# EAGLE board FB_BJ6 (EAGLE 5.00), part 1 of 2
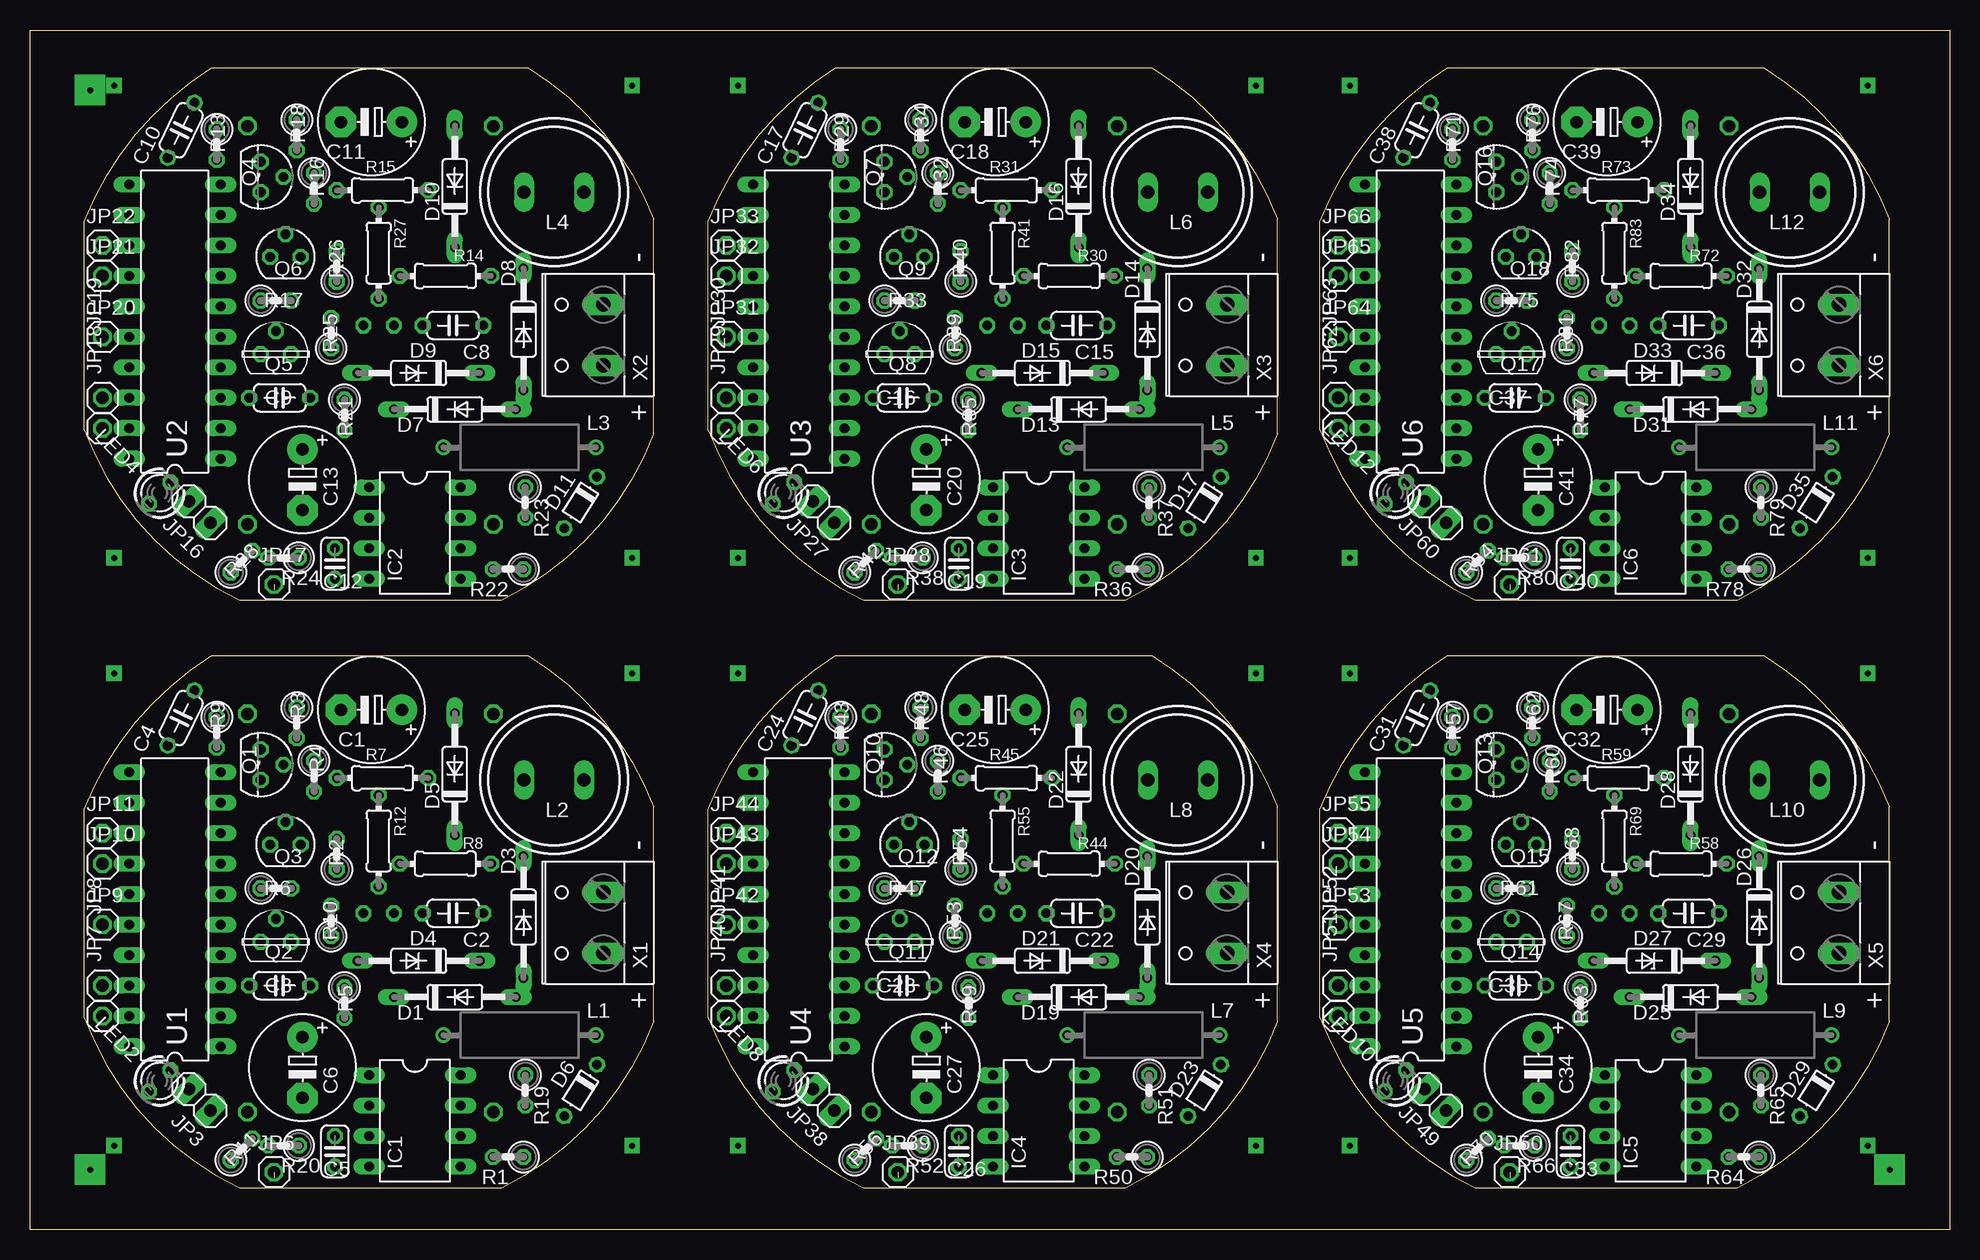
[diagram p0: board, top side]
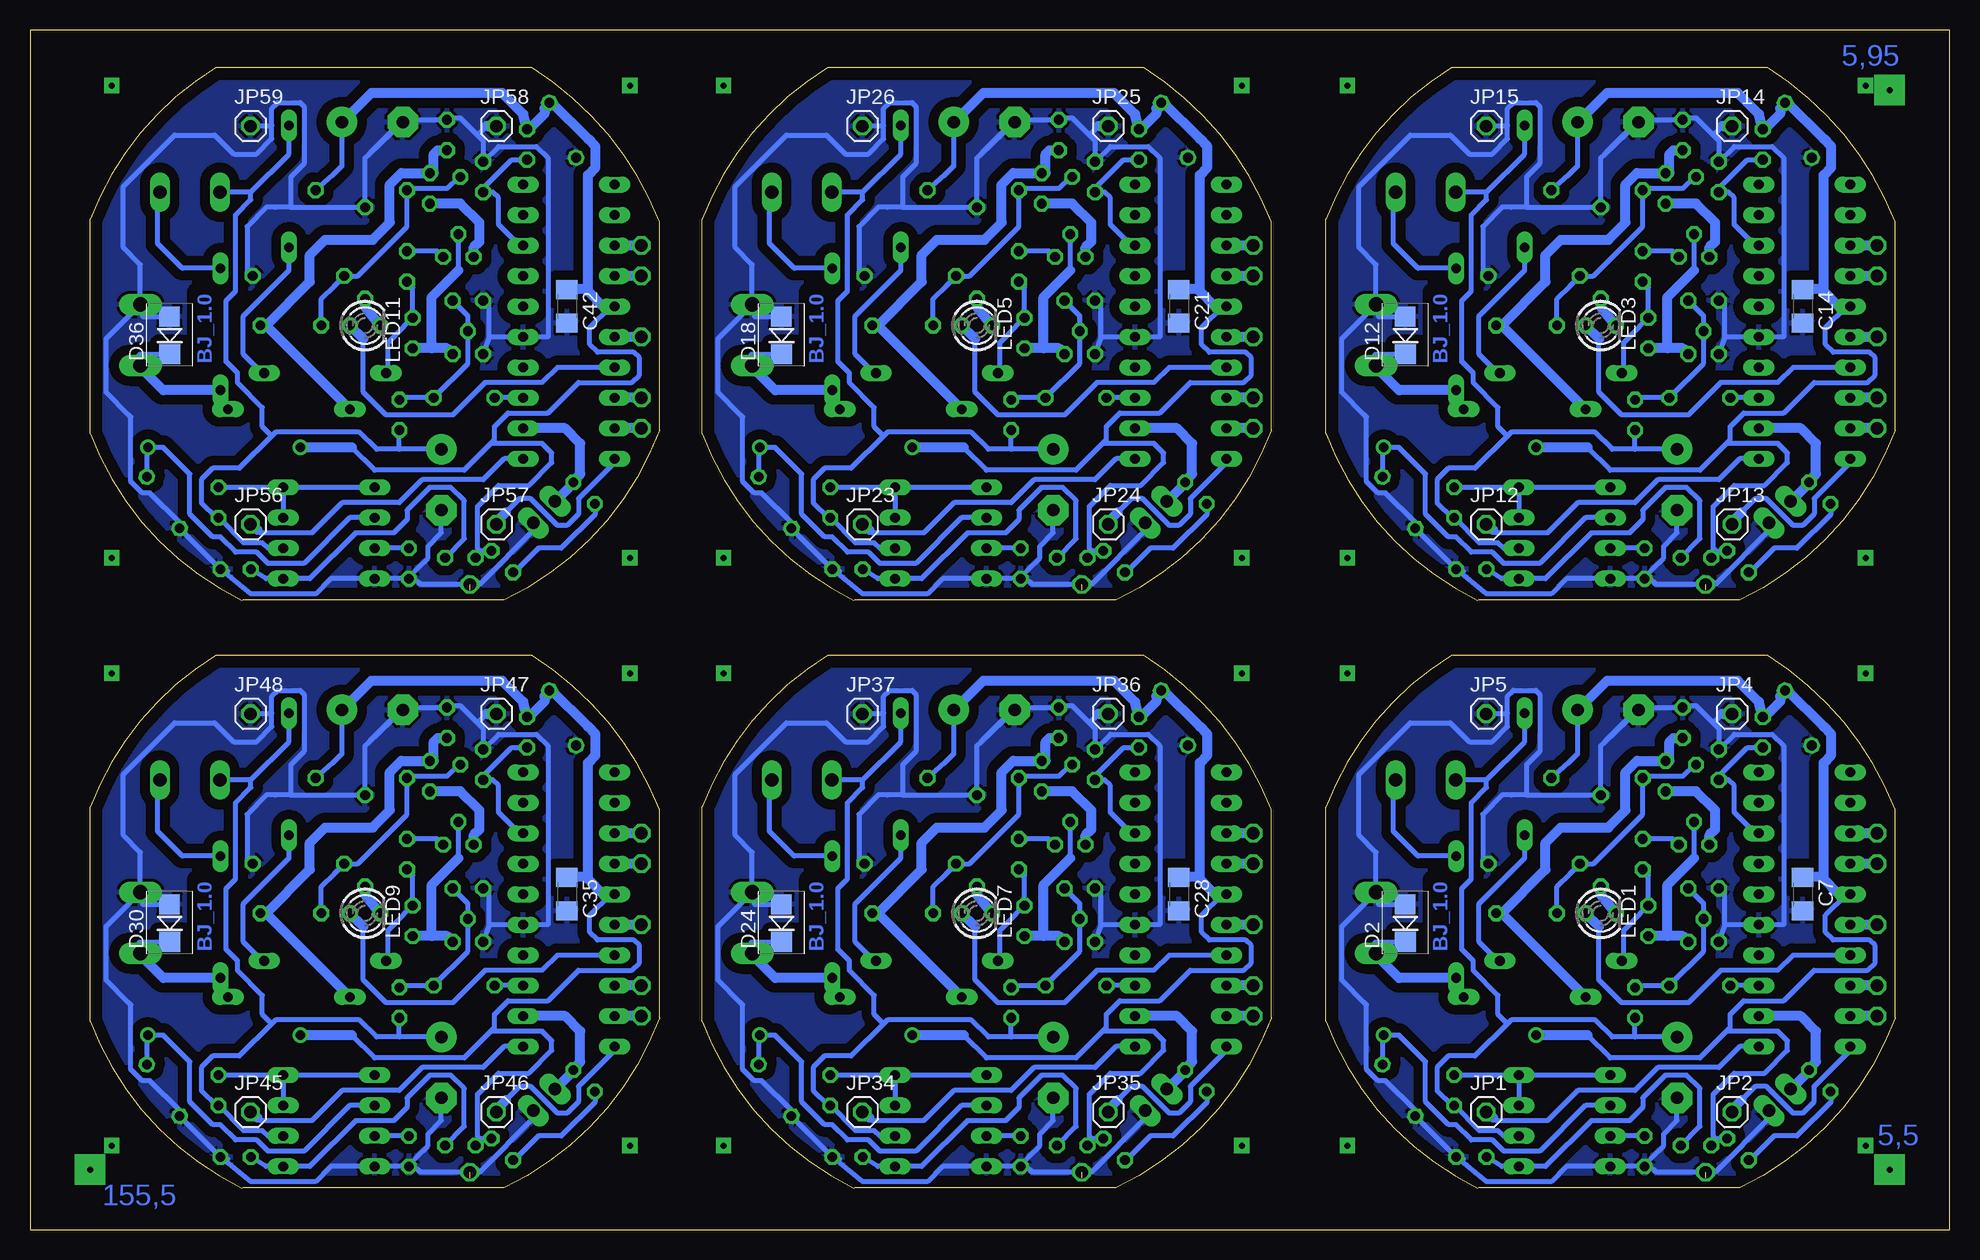
[diagram p1: board, bottom side, seen from below]

Size 160 x 100 mm. Coordinates in mm from the lower left corner, seen from the top.
Outline: 15.15,47.84 41.51,47.84
Outline: 51.96,17.36 51.97,35.21
Outline: 17.49,3.46 39.29,3.46
Outline: 17.48,3.46 arc-44 4.54,17.65 4.54,35.04 arc-36 15.15,47.84
Outline: 41.52,47.84 arc-38 51.97,35.21
Outline: 51.96,17.37 arc-44 39.29,3.46
Outline: 15.15,96.84 41.51,96.84
Outline: 51.96,66.36 51.97,84.21
Outline: 17.49,52.46 39.29,52.46
Outline: 17.48,52.46 arc-44 4.54,66.65 4.54,84.04 arc-36 15.15,96.84
Outline: 41.52,96.84 arc-38 51.97,84.21
Outline: 51.96,66.37 arc-44 39.29,52.46
Outline: 67.16,96.84 93.5,96.84
Outline: 103.96,66.36 103.97,84.21
Outline: 69.49,52.46 91.29,52.46
Outline: 69.48,52.46 arc-44 56.54,66.65 56.54,84.04 arc-36 67.15,96.84
Outline: 93.52,96.84 arc-38 103.97,84.21
Outline: 103.96,66.37 arc-44 91.29,52.46
Outline: 67.16,47.84 93.5,47.84
Outline: 103.96,17.36 103.97,35.21
Outline: 69.49,3.46 91.29,3.46
Outline: 69.48,3.46 arc-44 56.54,17.65 56.54,35.04 arc-36 67.15,47.84
Outline: 93.52,47.84 arc-38 103.97,35.21
Outline: 103.96,17.37 arc-44 91.29,3.46
Outline: 118.16,47.84 144.5,47.84
Outline: 154.96,17.36 154.97,35.21
Outline: 120.49,3.46 142.29,3.46
Outline: 120.48,3.46 arc-44 107.54,17.65 107.54,35.04 arc-36 118.15,47.84
Outline: 144.51,47.84 arc-38 154.97,35.21
Outline: 154.96,17.37 arc-44 142.29,3.46
Outline: 118.16,96.84 144.5,96.84
Outline: 154.96,66.36 154.97,84.21
Outline: 120.49,52.46 142.29,52.46
Outline: 120.48,52.46 arc-44 107.54,66.65 107.54,84.04 arc-36 118.15,96.84
Outline: 144.51,96.84 arc-38 154.97,84.21
Outline: 154.96,66.37 arc-44 142.29,52.46
Outline: 0,0 0,100 160,100 160,0 0,0
Copper layers (1*16): Top 0.035mm / dielectric 1.5mm / Bottom 0.035mm
Design rules "default": minimum track width 10mil, minimum drill 24mil, track to track 8mil, track to pad 8mil, pad to pad 8mil, via to via 8mil, smd to smd 8mil, copper to edge 40mil, drill to drill 8mil, minimum pad ring 10mil, minimum via ring 8mil, stop-mask expansion 4mil, vias tented up to drill 0mil, thermal gap 10mil

## Footprints (pad centres in the part's own frame; a part is rotated, then mirrored left to right if it is on the bottom)
E5-8,5 = drill 1.016 pad 2.54 round: + -2.54,0 | drill 1.016 pad 2.54 octagon: - 2.54,0
C050-024X044 = drill 0.813 octagon: 1 -2.54,0; 2 2.54,0
C025-024X044 = drill 0.813 octagon: 1 -1.27,0; 2 1.27,0
C1206 = smd 1.6 x 1.8: 1 -1.4,0; 2 1.4,0
DO35-10 = drill 0.813 long: A 5.08,0; C -5.08,0
SMA = smd 1.67 x 1.73: 1 -1.576,0; 2 1.58,0.014
DO35Z10 = drill 0.813 long: A 5.08,0; C -5.08,0
D-5 = drill 0.813 octagon: A 2.54,0; C -2.54,0
DIL08 = drill 0.813 long: 1 -3.81,-3.81; 2 -1.27,-3.81; 3 1.27,-3.81; 4 3.81,-3.81; 5 3.81,3.81; 6 1.27,3.81; 7 -1.27,3.81; 8 -3.81,3.81
1X01 = drill 1.016 octagon: 1 0,0
1X02 = drill 1.016 long: 1 -1.27,0; 2 1.27,0
2200-12.7 = drill 0.8 pad 1.27 round: 1 -6.35,0; 2 6.35,0
SD12_1000 = drill 1.1 long: 1 -2.5,0; 2 2.5,0
LED3MM = drill 0.813 octagon: A -1.27,0; K 1.27,0
TO92 = drill 0.813 octagon: 1 1.27,0; 2 0,1.905; 3 -1.27,0
TO237 = drill 0.813 octagon: 1 1.27,0; 2 0,1.905; 3 -1.27,0
SOT54D = drill 0.813 octagon: B 1.27,0; C 0,1.905; E -1.27,0
0207/2V = drill 0.813 octagon: 1 -1.27,0; 2 1.27,0
0204/7 = drill 0.813 octagon: 1 -3.81,0; 2 3.81,0
DIL20 = drill 0.813 long: 1 -11.43,-3.81; 2 -8.89,-3.81; 3 -6.35,-3.81; 4 -3.81,-3.81; 5 -1.27,-3.81; 6 1.27,-3.81; 7 3.81,-3.81; 8 6.35,-3.81; 9 8.89,-3.81; 10 11.43,-3.81; 11 11.43,3.81; 12 8.89,3.81; 13 6.35,3.81; 14 3.81,3.81; 15 1.27,3.81; 16 -1.27,3.81; 17 -3.81,3.81; 18 -6.35,3.81; 19 -8.89,3.81; 20 -11.43,3.81
W237-132 = drill 1.194 long: 1 -2.54,-0.635; 2 2.54,-0.635

## Placement (x,y rotation side)
C1  100µ  [E5-8,5]  28.46,43.32 180 top
C2  100n  [C050-024X044]  35.26,26.37 180 top
C3  100n  [C050-024X044]  20.81,20.33 180 top
C4  100n  [C050-024X044]  12.6,42.65 64.1 top
C5  470p  [C025-024X044]  25.41,6.52 270 top
C6  100µ  [E5-8,5]  22.72,13.51 270 top
C7  [C1206]  12.24,27.95 270 bottom
C8  100n  [C050-024X044]  35.26,75.37 180 top
C9  100n  [C050-024X044]  20.81,69.33 180 top
C10  100n  [C050-024X044]  12.6,91.65 64.1 top
C11  100µ  [E5-8,5]  28.46,92.32 180 top
C12  470p  [C025-024X044]  25.41,55.52 270 top
C13  100µ  [E5-8,5]  22.72,62.51 270 top
C14  [C1206]  12.24,76.95 270 bottom
C15  100n  [C050-024X044]  87.26,75.37 180 top
C16  100n  [C050-024X044]  72.81,69.33 180 top
C17  100n  [C050-024X044]  64.6,91.65 64.1 top
C18  100µ  [E5-8,5]  80.46,92.32 180 top
C19  470p  [C025-024X044]  77.42,55.52 270 top
C20  100µ  [E5-8,5]  74.72,62.51 270 top
C21  [C1206]  64.24,76.95 270 bottom
C22  100n  [C050-024X044]  87.26,26.37 180 top
C23  100n  [C050-024X044]  72.81,20.33 180 top
C24  100n  [C050-024X044]  64.6,42.65 64.1 top
C25  100µ  [E5-8,5]  80.46,43.32 180 top
C26  470p  [C025-024X044]  77.42,6.52 270 top
C27  100µ  [E5-8,5]  74.72,13.51 270 top
C28  [C1206]  64.24,27.95 270 bottom
C29  100n  [C050-024X044]  138.26,26.37 180 top
C30  100n  [C050-024X044]  123.81,20.33 180 top
C31  100n  [C050-024X044]  115.6,42.65 64.1 top
C32  100µ  [E5-8,5]  131.46,43.32 180 top
C33  470p  [C025-024X044]  128.41,6.52 270 top
C34  100µ  [E5-8,5]  125.72,13.51 270 top
C35  [C1206]  115.24,27.95 270 bottom
C36  100n  [C050-024X044]  138.26,75.37 180 top
C37  100n  [C050-024X044]  123.81,69.33 180 top
C38  100n  [C050-024X044]  115.6,91.65 64.1 top
C39  100µ  [E5-8,5]  131.46,92.32 180 top
C40  470p  [C025-024X044]  128.41,55.52 270 top
C41  100µ  [E5-8,5]  125.72,62.51 270 top
C42  [C1206]  115.24,76.95 270 bottom
D1  [DO35-10]  35.42,19.38 0 top
D2  [SMA]  45.35,25.54 90 bottom
D3  [DO35-10]  41.13,26.05 270 top
D4  7V5  [DO35Z10]  32.4,22.4 180 top
D5  [DO35-10]  35.42,37.96 90 top
D6  BAT46  [D-5]  45.89,11.6 237.6 top
D7  [DO35-10]  35.42,68.38 0 top
D8  [DO35-10]  41.13,75.05 270 top
D9  7V5  [DO35Z10]  32.4,71.4 180 top
D10  [DO35-10]  35.42,86.96 90 top
D11  BAT46  [D-5]  45.89,60.6 237.6 top
D12  [SMA]  45.35,74.54 90 bottom
D13  [DO35-10]  87.42,68.38 0 top
D14  [DO35-10]  93.13,75.05 270 top
D15  7V5  [DO35Z10]  84.4,71.4 180 top
D16  [DO35-10]  87.42,86.96 90 top
D17  BAT46  [D-5]  97.89,60.6 237.6 top
D18  [SMA]  97.35,74.54 90 bottom
D19  [DO35-10]  87.42,19.38 0 top
D20  [DO35-10]  93.13,26.05 270 top
D21  7V5  [DO35Z10]  84.4,22.4 180 top
D22  [DO35-10]  87.42,37.96 90 top
D23  BAT46  [D-5]  97.89,11.6 237.6 top
D24  [SMA]  97.35,25.54 90 bottom
D25  [DO35-10]  138.42,19.38 0 top
D26  [DO35-10]  144.13,26.05 270 top
D27  7V5  [DO35Z10]  135.4,22.4 180 top
D28  [DO35-10]  138.42,37.96 90 top
D29  BAT46  [D-5]  148.89,11.6 237.6 top
D30  [SMA]  148.35,25.54 90 bottom
D31  [DO35-10]  138.42,68.38 0 top
D32  [DO35-10]  144.13,75.05 270 top
D33  7V5  [DO35Z10]  135.4,71.4 180 top
D34  [DO35-10]  138.42,86.96 90 top
D35  BAT46  [D-5]  148.89,60.6 237.6 top
D36  [SMA]  148.35,74.54 90 bottom
IC1  MC34063AP  [DIL08]  32.08,9.06 270 top
IC2  MC34063AP  [DIL08]  32.08,58.06 270 top
IC3  MC34063AP  [DIL08]  84.08,58.06 270 top
IC4  MC34063AP  [DIL08]  84.08,9.06 270 top
IC5  MC34063AP  [DIL08]  135.08,9.06 270 top
IC6  MC34063AP  [DIL08]  135.08,58.06 270 top
JP1  [1X01]  38.62,9.79 0 bottom
JP2  [1X01]  18.12,9.79 0 bottom
JP3  [1X02]  14.14,10.81 135 top
JP4  [1X01]  18.12,42.99 0 bottom
JP5  [1X01]  38.62,42.99 0 bottom
JP6  [1X01]  20.34,4.78 0 top
JP7  [1X01]  6.05,17.8 0 top
JP8  [1X01]  6.05,20.34 0 top
JP9  [1X01]  6.05,25.41 0 top
JP10  [1X01]  6.05,30.5 0 top
JP11  [1X01]  6.05,33.04 0 top
JP12  [1X01]  38.62,58.79 0 bottom
JP13  [1X01]  18.12,58.79 0 bottom
JP14  [1X01]  18.12,91.99 0 bottom
JP15  [1X01]  38.62,91.99 0 bottom
JP16  [1X02]  14.14,59.81 135 top
JP17  [1X01]  20.34,53.78 0 top
JP18  [1X01]  6.05,66.8 0 top
JP19  [1X01]  6.05,69.34 0 top
JP20  [1X01]  6.05,74.42 0 top
JP21  [1X01]  6.05,79.5 0 top
JP22  [1X01]  6.05,82.04 0 top
JP23  [1X01]  90.62,58.79 0 bottom
JP24  [1X01]  70.12,58.79 0 bottom
JP25  [1X01]  70.12,91.99 0 bottom
JP26  [1X01]  90.62,91.99 0 bottom
JP27  [1X02]  66.14,59.81 135 top
JP28  [1X01]  72.33,53.78 0 top
JP29  [1X01]  58.05,66.8 0 top
JP30  [1X01]  58.05,69.34 0 top
JP31  [1X01]  58.05,74.42 0 top
JP32  [1X01]  58.05,79.5 0 top
JP33  [1X01]  58.05,82.04 0 top
JP34  [1X01]  90.62,9.79 0 bottom
JP35  [1X01]  70.12,9.79 0 bottom
JP36  [1X01]  70.12,42.99 0 bottom
JP37  [1X01]  90.62,42.99 0 bottom
JP38  [1X02]  66.14,10.81 135 top
JP39  [1X01]  72.33,4.78 0 top
JP40  [1X01]  58.05,17.8 0 top
JP41  [1X01]  58.05,20.34 0 top
JP42  [1X01]  58.05,25.41 0 top
JP43  [1X01]  58.05,30.5 0 top
JP44  [1X01]  58.05,33.04 0 top
JP45  [1X01]  141.62,9.79 0 bottom
JP46  [1X01]  121.12,9.79 0 bottom
JP47  [1X01]  121.12,42.99 0 bottom
JP48  [1X01]  141.62,42.99 0 bottom
JP49  [1X02]  117.14,10.81 135 top
JP50  [1X01]  123.33,4.78 0 top
JP51  [1X01]  109.05,17.8 0 top
JP52  [1X01]  109.05,20.34 0 top
JP53  [1X01]  109.05,25.41 0 top
JP54  [1X01]  109.05,30.5 0 top
JP55  [1X01]  109.05,33.04 0 top
JP56  [1X01]  141.62,58.79 0 bottom
JP57  [1X01]  121.12,58.79 0 bottom
JP58  [1X01]  121.12,91.99 0 bottom
JP59  [1X01]  141.62,91.99 0 bottom
JP60  [1X02]  117.14,59.81 135 top
JP61  [1X01]  123.33,53.78 0 top
JP62  [1X01]  109.05,66.8 0 top
JP63  [1X01]  109.05,69.34 0 top
JP64  [1X01]  109.05,74.42 0 top
JP65  [1X01]  109.05,79.5 0 top
JP66  [1X01]  109.05,82.04 0 top
L1  220µH  [2200-12.7]  40.81,16.21 0 top
L2  150mH  [SD12_1000]  43.67,37.48 180 top
L3  220µH  [2200-12.7]  40.81,65.21 0 top
L4  150mH  [SD12_1000]  43.67,86.48 180 top
L5  220µH  [2200-12.7]  92.81,65.21 0 top
L6  150mH  [SD12_1000]  95.67,86.48 180 top
L7  220µH  [2200-12.7]  92.81,16.21 0 top
L8  150mH  [SD12_1000]  95.67,37.48 180 top
L9  220µH  [2200-12.7]  143.81,16.21 0 top
L10  150mH  [SD12_1000]  146.67,37.48 180 top
L11  220µH  [2200-12.7]  143.81,65.21 0 top
L12  150mH  [SD12_1000]  146.67,86.48 180 top
LED1  [LED3MM]  29.07,26.37 0 bottom
LED2  [LED3MM]  10.81,12.4 45 top
LED3  [LED3MM]  29.07,75.37 0 bottom
LED4  [LED3MM]  10.81,61.4 45 top
LED5  [LED3MM]  81.07,75.37 0 bottom
LED6  [LED3MM]  62.81,61.4 45 top
LED7  [LED3MM]  81.07,26.37 0 bottom
LED8  [LED3MM]  62.81,12.4 45 top
LED9  [LED3MM]  132.07,26.37 0 bottom
LED10  [LED3MM]  113.81,12.4 45 top
LED11  [LED3MM]  132.07,75.37 0 bottom
LED12  [LED3MM]  113.81,61.4 45 top
Q1  BC557  [TO92]  19.22,38.75 270 top
Q2  2N7000  [TO237]  20.49,23.99 0 top
Q3  BC640  [SOT54D]  21.29,32.08 0 top
Q4  BC557  [TO92]  19.22,87.75 270 top
Q5  2N7000  [TO237]  20.49,72.99 0 top
Q6  BC640  [SOT54D]  21.29,81.08 0 top
Q7  BC557  [TO92]  71.22,87.75 270 top
Q8  2N7000  [TO237]  72.49,72.99 0 top
Q9  BC640  [SOT54D]  73.29,81.08 0 top
Q10  BC557  [TO92]  71.22,38.75 270 top
Q11  2N7000  [TO237]  72.49,23.99 0 top
Q12  BC640  [SOT54D]  73.29,32.08 0 top
Q13  BC557  [TO92]  122.22,38.75 270 top
Q14  2N7000  [TO237]  123.49,23.99 0 top
Q15  BC640  [SOT54D]  124.29,32.08 0 top
Q16  BC557  [TO92]  122.22,87.75 270 top
Q17  2N7000  [TO237]  123.49,72.99 0 top
Q18  BC640  [SOT54D]  124.29,81.08 0 top
R1  2k2  [0207/2V]  39.86,6.05 180 top
R2  100  [0207/2V]  25.57,31.29 90 top
R3  100k  [0207/2V]  22.24,42.24 270 top
R4  12  [0207/2V]  23.67,37.8 270 top
R5  220k  [0207/2V]  26.21,18.91 270 top
R6  12k  [0207/2V]  20.49,28.43 0 top
R7  82k  [0204/7]  29.38,37.64 0 top
R8  47k  [0204/7]  34.62,30.5 180 top
R9  10k  [0207/2V]  15.57,41.45 270 top
R10  5k6  [0207/2V]  25.1,25.73 90 top
R11  1K2  [0207/2V]  17.64,6.68 45 top
R12  1K2  [0204/7]  29.07,32.4 270 top
R13  10k  [0207/2V]  15.57,90.45 270 top
R14  47k  [0204/7]  34.62,79.5 180 top
R15  82k  [0204/7]  29.38,86.64 0 top
R16  12  [0207/2V]  23.67,86.8 270 top
R17  12k  [0207/2V]  20.49,77.43 0 top
R18  100k  [0207/2V]  22.24,91.24 270 top
R19  3R3  [0207/2V]  41.29,11.6 270 top
R20  3k6  [0207/2V]  21.13,7 180 top
R21  220k  [0207/2V]  26.21,67.91 270 top
R22  2k2  [0207/2V]  39.86,55.05 180 top
R23  3R3  [0207/2V]  41.29,60.6 270 top
R24  3k6  [0207/2V]  21.13,56 180 top
R25  5k6  [0207/2V]  25.1,74.73 90 top
R26  100  [0207/2V]  25.57,80.29 90 top
R27  1K2  [0204/7]  29.07,81.4 270 top
R28  1K2  [0207/2V]  17.64,55.68 45 top
R29  10k  [0207/2V]  67.57,90.45 270 top
R30  47k  [0204/7]  86.62,79.5 180 top
R31  82k  [0204/7]  81.38,86.64 0 top
R32  12  [0207/2V]  75.67,86.8 270 top
R33  12k  [0207/2V]  72.49,77.43 0 top
R34  100k  [0207/2V]  74.24,91.24 270 top
R35  220k  [0207/2V]  78.21,67.91 270 top
R36  2k2  [0207/2V]  91.86,55.05 180 top
R37  3R3  [0207/2V]  93.29,60.6 270 top
R38  3k6  [0207/2V]  73.13,56 180 top
R39  5k6  [0207/2V]  77.1,74.73 90 top
R40  100  [0207/2V]  77.57,80.29 90 top
R41  1K2  [0204/7]  81.07,81.4 270 top
R42  1K2  [0207/2V]  69.64,55.68 45 top
R43  10k  [0207/2V]  67.57,41.45 270 top
R44  47k  [0204/7]  86.62,30.5 180 top
R45  82k  [0204/7]  81.38,37.64 0 top
R46  12  [0207/2V]  75.67,37.8 270 top
R47  12k  [0207/2V]  72.49,28.43 0 top
R48  100k  [0207/2V]  74.24,42.24 270 top
R49  220k  [0207/2V]  78.21,18.91 270 top
R50  2k2  [0207/2V]  91.86,6.05 180 top
R51  3R3  [0207/2V]  93.29,11.6 270 top
R52  3k6  [0207/2V]  73.13,7 180 top
R53  5k6  [0207/2V]  77.1,25.73 90 top
R54  100  [0207/2V]  77.57,31.29 90 top
R55  1K2  [0204/7]  81.07,32.4 270 top
R56  1K2  [0207/2V]  69.64,6.68 45 top
R57  10k  [0207/2V]  118.57,41.45 270 top
R58  47k  [0204/7]  137.62,30.5 180 top
R59  82k  [0204/7]  132.38,37.64 0 top
R60  12  [0207/2V]  126.67,37.8 270 top
R61  12k  [0207/2V]  123.49,28.43 0 top
R62  100k  [0207/2V]  125.24,42.24 270 top
R63  220k  [0207/2V]  129.21,18.91 270 top
R64  2k2  [0207/2V]  142.86,6.05 180 top
R65  3R3  [0207/2V]  144.29,11.6 270 top
R66  3k6  [0207/2V]  124.13,7 180 top
R67  5k6  [0207/2V]  128.1,25.73 90 top
R68  100  [0207/2V]  128.57,31.29 90 top
R69  1K2  [0204/7]  132.07,32.4 270 top
R70  1K2  [0207/2V]  120.64,6.68 45 top
R71  10k  [0207/2V]  118.57,90.45 270 top
R72  47k  [0204/7]  137.62,79.5 180 top
R73  82k  [0204/7]  132.38,86.64 0 top
R74  12  [0207/2V]  126.67,86.8 270 top
R75  12k  [0207/2V]  123.49,77.43 0 top
R76  100k  [0207/2V]  125.24,91.24 270 top
R77  220k  [0207/2V]  129.21,67.91 270 top
R78  2k2  [0207/2V]  142.86,55.05 180 top
R79  3R3  [0207/2V]  144.29,60.6 270 top
R80  3k6  [0207/2V]  124.13,56 180 top
R81  5k6  [0207/2V]  128.1,74.73 90 top
R82  100  [0207/2V]  128.57,80.29 90 top
R83  1K2  [0204/7]  132.07,81.4 270 top
R84  1K2  [0207/2V]  120.64,55.68 45 top
U1  89LPC922  [DIL20]  12.08,26.68 90 top
U2  89LPC922  [DIL20]  12.08,75.69 90 top
U3  89LPC922  [DIL20]  64.08,75.69 90 top
U4  89LPC922  [DIL20]  64.08,26.68 90 top
U5  89LPC922  [DIL20]  115.08,26.68 90 top
U6  89LPC922  [DIL20]  115.08,75.69 90 top
X1  [W237-132]  47.16,25.57 90 top
X2  [W237-132]  47.16,74.57 90 top
X3  [W237-132]  99.16,74.57 90 top
X4  [W237-132]  99.16,25.57 90 top
X5  [W237-132]  150.16,25.57 90 top
X6  [W237-132]  150.16,74.57 90 top

## Library data of the parts
C1-C42 L1 L3 L5 L7 L9 L11 R1-R84 = rcl
D1 D3-D11 D13-D17 D19-D23 D25-D29 D31-D35 = diode
D2 D12 D18 D24 D30 D36 = semicon-smd-ipc
IC1-IC6 = mc34063
JP1-JP66 = pinhead
L2 L4 L6 L8 L10 L12 = inductor-neosid
LED1-LED12 = led
Q1 Q4 Q7 Q10 Q13 Q16 = transistor-pnp
Q2 Q5 Q8 Q11 Q14 Q17 = transistor-fet
Q3 Q6 Q9 Q12 Q15 Q18 = transistor-small-signal
U1-U6 = micro-philips
X1-X6 = con-wago-508

## Nets
GND: C1.- C4.1 C5.2 C6.- C7.2 D2.2 D6.A IC1.4 JP3.1 JP4.1 JP5.1 JP6.1 Q1.3 Q2.3 R1.1 R3.1 R6.1 R8.1 R12.1 U1.5 X1.2
GND1: C10.1 C11.- C12.2 C13.- C14.2 D11.A D12.2 IC2.4 JP14.1 JP15.1 JP16.1 JP17.1 Q4.3 Q5.3 R14.1 R17.1 R18.1 R22.1 R27.1 U2.5 X2.2
GND2: C17.1 C18.- C19.2 C20.- C21.2 D17.A D18.2 IC3.4 JP25.1 JP26.1 JP27.1 JP28.1 Q7.3 Q8.3 R30.1 R33.1 R34.1 R36.1 R41.1 U3.5 X3.2
GND3: C24.1 C25.- C26.2 C27.- C28.2 D23.A D24.2 IC4.4 JP36.1 JP37.1 JP38.1 JP39.1 Q10.3 Q11.3 R44.1 R47.1 R48.1 R50.1 R55.1 U4.5 X4.2
GND4: C31.1 C32.- C33.2 C34.- C35.2 D29.A D30.2 IC5.4 JP47.1 JP48.1 JP49.1 JP50.1 Q13.3 Q14.3 R58.1 R61.1 R62.1 R64.1 R69.1 U5.5 X5.2
GND5: C38.1 C39.- C40.2 C41.- C42.2 D35.A D36.2 IC6.4 JP58.1 JP59.1 JP60.1 JP61.1 Q16.3 Q17.3 R72.1 R75.1 R76.1 R78.1 R83.1 U6.5 X6.2
N$1: Q1.1 R9.2 U1.8
N$2: C2.2 Q1.2 R7.1 R8.2
N$3: IC1.5 R1.2 R20.1
N$4: IC1.1 IC1.7 IC1.8 R19.1
N$5: C3.2 U1.3
N$6: Q2.1 Q3.C R10.1
N$7: C6.+ D5.A IC1.6 L2.2 R5.2 R19.2
N$8: D3.C L2.1
N$9: C2.1 D1.C R3.2 R4.1
N$10: D6.C IC1.2 L1.2
N$11: D4.A R2.1 R10.2
N$12: Q3.E R4.2
N$13: C5.1 IC1.3
N$14: Q3.B R2.2
N$15: LED1.A U1.17
N$16: D1.A D2.1 D3.A X1.1
N$17: JP3.2 LED2.K U1.2
N$18: LED1.K R12.2
N$19: LED2.A R11.1
N$20: JP7.1 U1.19
N$21: JP1.1 U1.1
N$22: JP2.1 U1.20
N$23: JP8.1 U1.18
N$28: JP9.1 U1.16
N$29: JP11.1 U1.13
N$30: JP10.1 U1.14
N$31: Q4.1 R13.2 U2.8
N$32: C8.2 Q4.2 R14.2 R15.1
N$33: C9.2 U2.3
N$34: C3.1 Q2.2 R5.1 R6.2
N$35: C8.1 D7.C R16.1 R18.2
N$36: D7.A D8.A D12.1 X2.1
N$37: JP16.2 LED4.K U2.2
N$38: C9.1 Q5.2 R17.2 R21.1
N$39: IC2.5 R22.2 R24.1
N$40: D4.C D5.C
N$41: IC2.1 IC2.7 IC2.8 R23.1
N$42: D11.C IC2.2 L3.2
N$43: C12.1 IC2.3
N$44: C13.+ D10.A IC2.6 L4.2 R21.2 R23.2
N$45: D8.C L4.1
N$46: Q5.1 Q6.C R25.1
N$47: D9.A R25.2 R26.1
N$48: Q6.E R16.2
N$49: Q6.B R26.2
N$50: D9.C D10.C
N$51: LED3.A U2.17
N$52: LED3.K R27.2
N$53: JP12.1 U2.1
N$54: JP13.1 U2.20
N$55: LED4.A R28.1
N$56: JP18.1 U2.19
N$57: JP19.1 U2.18
N$62: JP20.1 U2.16
N$63: JP22.1 U2.13
N$64: JP21.1 U2.14
N$65: Q7.1 R29.2 U3.8
N$66: C15.2 Q7.2 R30.2 R31.1
N$67: C16.2 U3.3
N$68: C15.1 D13.C R32.1 R34.2
N$69: D13.A D14.A D18.1 X3.1
N$70: JP27.2 LED6.K U3.2
N$71: C16.1 Q8.2 R33.2 R35.1
N$72: IC3.5 R36.2 R38.1
N$73: IC3.1 IC3.7 IC3.8 R37.1
N$74: D17.C IC3.2 L5.2
N$75: C19.1 IC3.3
N$76: C20.+ D16.A IC3.6 L6.2 R35.2 R37.2
N$77: D14.C L6.1
N$78: Q8.1 Q9.C R39.1
N$79: D15.A R39.2 R40.1
N$80: Q9.E R32.2
N$81: Q9.B R40.2
N$82: D15.C D16.C
N$83: LED5.A U3.17
N$84: LED5.K R41.2
N$85: JP23.1 U3.1
N$86: JP24.1 U3.20
N$87: LED6.A R42.1
N$88: JP29.1 U3.19
N$89: JP30.1 U3.18
N$94: JP31.1 U3.16
N$95: JP33.1 U3.13
N$96: JP32.1 U3.14
N$97: Q10.1 R43.2 U4.8
N$98: C22.2 Q10.2 R44.2 R45.1
N$99: C23.2 U4.3
N$100: C22.1 D19.C R46.1 R48.2
N$101: D19.A D20.A D24.1 X4.1
N$102: JP38.2 LED8.K U4.2
N$103: C23.1 Q11.2 R47.2 R49.1
N$104: IC4.5 R50.2 R52.1
N$105: IC4.1 IC4.7 IC4.8 R51.1
N$106: D23.C IC4.2 L7.2
N$107: C26.1 IC4.3
N$108: C27.+ D22.A IC4.6 L8.2 R49.2 R51.2
N$109: D20.C L8.1
N$110: Q11.1 Q12.C R53.1
N$111: D21.A R53.2 R54.1
N$112: Q12.E R46.2
N$113: Q12.B R54.2
N$114: D21.C D22.C
N$115: LED7.A U4.17
N$116: LED7.K R55.2
N$117: JP34.1 U4.1
N$118: JP35.1 U4.20
N$119: LED8.A R56.1
N$120: JP40.1 U4.19
N$121: JP41.1 U4.18
N$126: JP42.1 U4.16
N$127: JP44.1 U4.13
N$128: JP43.1 U4.14
N$129: Q13.1 R57.2 U5.8
N$130: C29.2 Q13.2 R58.2 R59.1
N$131: C30.2 U5.3
N$132: C29.1 D25.C R60.1 R62.2
N$133: D25.A D26.A D30.1 X5.1
N$134: JP49.2 LED10.K U5.2
N$135: C30.1 Q14.2 R61.2 R63.1
N$136: IC5.5 R64.2 R66.1
N$137: IC5.1 IC5.7 IC5.8 R65.1
N$138: D29.C IC5.2 L9.2
N$139: C33.1 IC5.3
N$140: C34.+ D28.A IC5.6 L10.2 R63.2 R65.2
N$141: D26.C L10.1
N$142: Q14.1 Q15.C R67.1
N$143: D27.A R67.2 R68.1
N$144: Q15.E R60.2
N$145: Q15.B R68.2
N$146: D27.C D28.C
N$147: LED9.A U5.17
N$148: LED9.K R69.2
N$149: JP45.1 U5.1
N$150: JP46.1 U5.20
N$151: LED10.A R70.1
N$152: JP51.1 U5.19
N$153: JP52.1 U5.18
N$158: JP53.1 U5.16
N$159: JP55.1 U5.13
N$160: JP54.1 U5.14
N$161: Q16.1 R71.2 U6.8
N$162: C36.2 Q16.2 R72.2 R73.1
N$163: C37.2 U6.3
N$164: C36.1 D31.C R74.1 R76.2
N$165: D31.A D32.A D36.1 X6.1
N$166: JP60.2 LED12.K U6.2
N$167: C37.1 Q17.2 R75.2 R77.1
N$168: IC6.5 R78.2 R80.1
N$169: IC6.1 IC6.7 IC6.8 R79.1
N$170: D35.C IC6.2 L11.2
N$171: C40.1 IC6.3
N$172: C41.+ D34.A IC6.6 L12.2 R77.2 R79.2
N$173: D32.C L12.1
N$174: Q17.1 Q18.C R81.1
N$175: D33.A R81.2 R82.1
N$176: Q18.E R74.2
N$177: Q18.B R82.2
N$178: D33.C D34.C
N$179: LED11.A U6.17
N$180: LED11.K R83.2
N$181: JP56.1 U6.1
N$182: JP57.1 U6.20
N$183: LED12.A R84.1
N$184: JP62.1 U6.19
N$185: JP63.1 U6.18
N$190: JP64.1 U6.16
N$191: JP66.1 U6.13
N$192: JP65.1 U6.14
VCC: C1.+ C4.2 C7.1 L1.1 R7.2 R9.1 R11.2 R20.2 U1.15
VCC1: C10.2 C11.+ C14.1 L3.1 R13.1 R15.2 R24.2 R28.2 U2.15
VCC2: C17.2 C18.+ C21.1 L5.1 R29.1 R31.2 R38.2 R42.2 U3.15
VCC3: C24.2 C25.+ C28.1 L7.1 R43.1 R45.2 R52.2 R56.2 U4.15
VCC4: C31.2 C32.+ C35.1 L9.1 R57.1 R59.2 R66.2 R70.2 U5.15
VCC5: C38.2 C39.+ C42.1 L11.1 R71.1 R73.2 R80.2 R84.2 U6.15